# Altium PCB PCB1.PcbDoc
Units mil, origin at the board's own origin, x right, y up, seen from the top; angles counter-clockwise.
Board outline 9035 x 4000 mil, 4 copper layers (Top Layer, Mid-Layer 1, Mid-Layer 14, Bottom Layer); 25 components, 27 nets, 176 pads, 3 vias.
Unrouted connection lines stored in the file: 8.
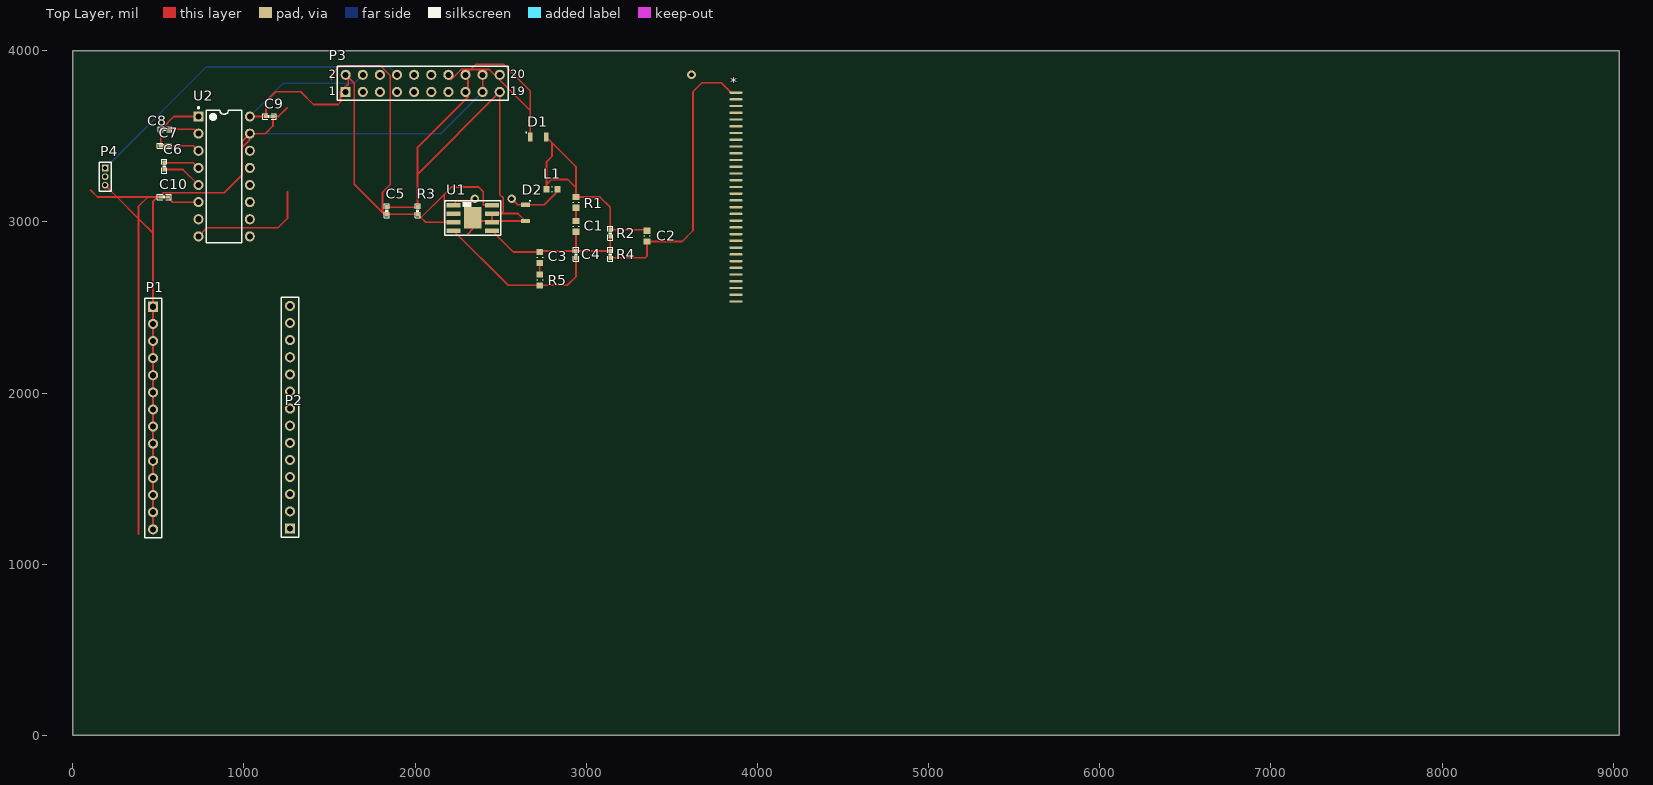
[diagram p0: Top Layer view]
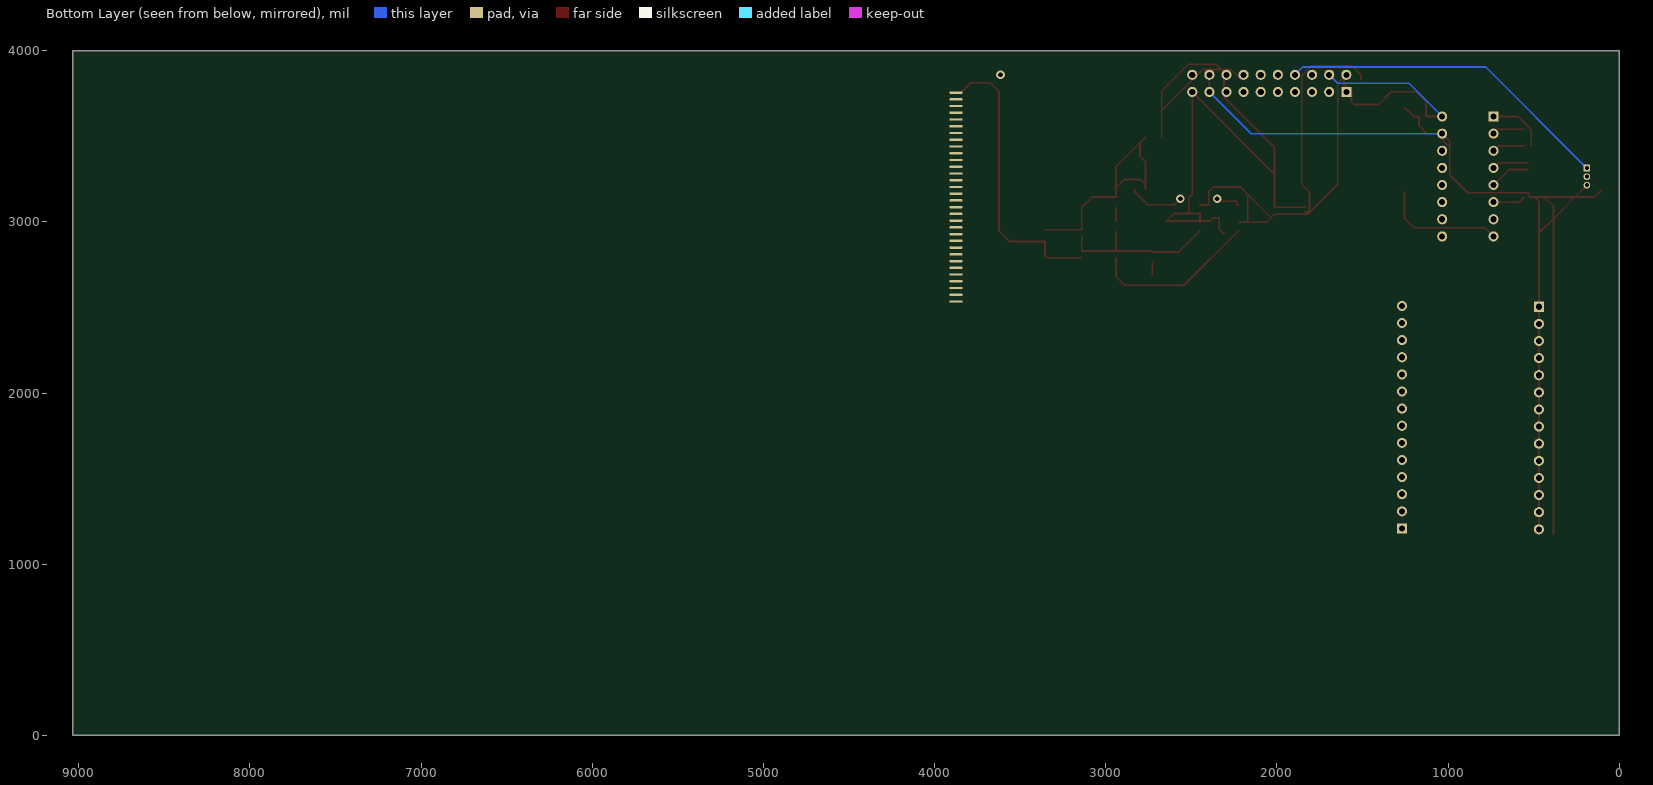
[diagram p1: Bottom Layer view, seen from below]
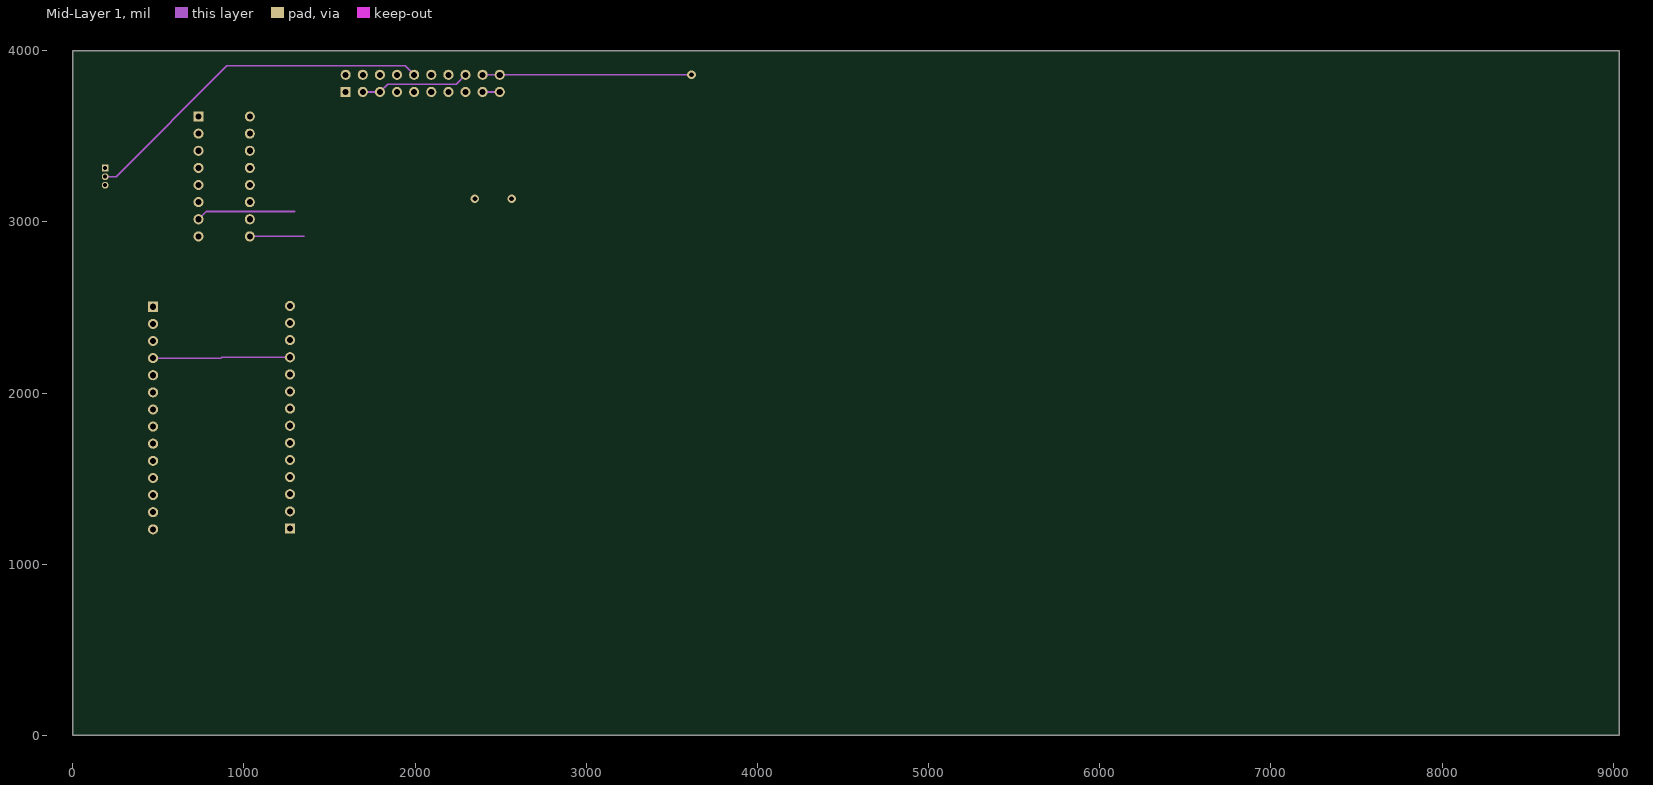
[diagram p2: Mid-Layer 1]
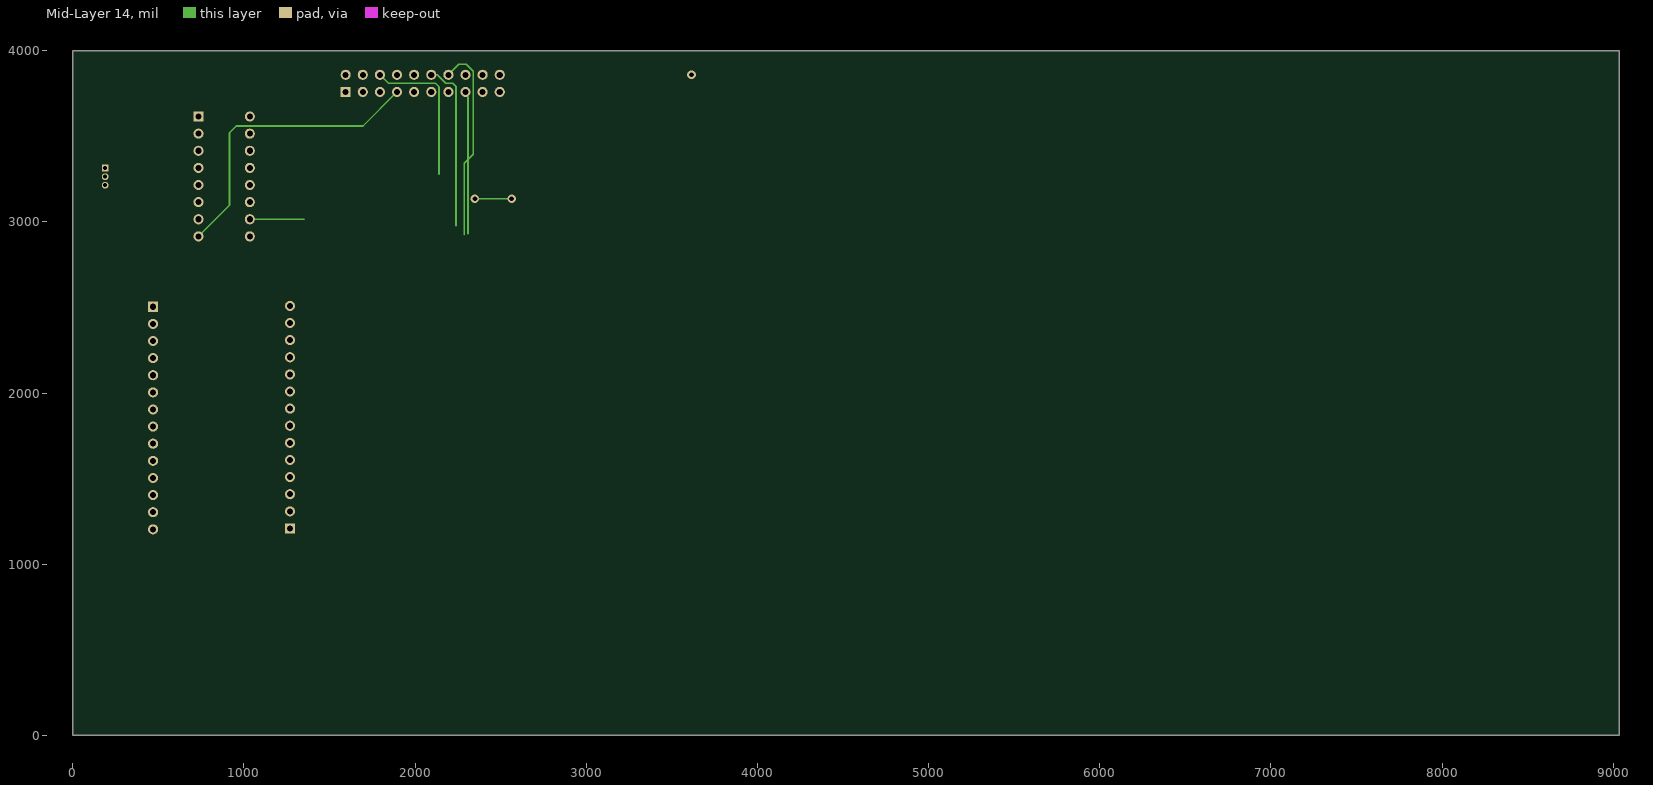
[diagram p3: Mid-Layer 14]

## Layer stack, top to bottom
Top Solder: solder mask 0.4, Solder Resist, Dk 3.5
Top Layer: signal copper 1.4
Dielectric 1: dielectric 12.6, FR-4, Dk 4.8
Mid-Layer 1: signal copper 1.4
Dielectric3: dielectric 12.6, FR-4, Dk 4.8
Mid-Layer 14: signal copper 1.4
Dielectric2: dielectric 12.6, FR-4, Dk 4.8
Bottom Layer: signal copper 1.4
Bottom Solder: solder mask 0.4, Solder Resist, Dk 3.5

## Board outline
0,0 9035,0 9035,4000 0,4000

## Design rules (kind name [scope] priority, off if disabled: settings)
Clearance [All] p1: gap=10
PolygonConnect [All] p1: connectstyle=Relief reliefconductorwidth=10 reliefentries=4 polygonreliefangle="90 Angle" airgapwidth=10
RoutingVias [All] p1: holewidth=28 width=50 viastyle="Through Hole" minholewidth=28 minwidth=50 maxholewidth=28 maxwidth=50
SolderMaskExpansion [All] p1: expansion=4
Width [All] p1: maxlimit=10 minlimit=10 preferedwidth=10
30 further rules are at their usual default settings.

## Classes and differential pairs
component class Serial: C6 C7 C8 C9 C10 U2
component class Master: * P1 P2 P3 P4
component class BoardPower: C1 C2 C3 C4 C5 D1 D2 L1 R1 R2 R3 R4 R5 U1

## Components (designator, comment, footprint, x,y, rotation, side; value= is the part's Value field where it differs from the comment)
* "PCIE-064-02-F-D-EMS2" PCIE-064-02-F-D-EMS2 3875,2534.49 r90 top
C1 "CAP_2" 0603 2940,2973.5 r270 top
C2 "CAP_1_25" 0603 3355,2916.5 r90 top
C3 "CAP_1_17" 0603 2729.25,2791.97 r90 top
C4 "CAP_1_16" 0402 2940,2810 r90 top
C5 "CAP_1_21_3" 0402 1835,3065 r270 top
C6 "CAP_1_21_4" 0402 535,3325 r270 top
C7 "CAP_1_21_4" 0402 535,3445 r0 top
C8 "CAP_1_21_4" 0402 540,3540 r0 top
C9 "CAP_1_21_4" 0402 1150,3615 r180 top
C10 "CAP_1_21_4" 0402 535,3145 r0 top
D1 "SCHOTTKY DIODE" SOD323 2720,3495 r0 top
D2 "SCHOTTKY DIODE" SOD323 2645,3051.89 r270 top
L1 "INDUCTOR" 0603 2800,3190 r180 top
P1 "Header 14" HDR1X14 470,2503.86 r270 top
P2 "Header 14" HDR1X14 1270,1208.86 r90 top
P3 "Header 10X2" HDR2X10 1595,3758.86 r0 top
P4 "MHDR1X3" MHDR1X3 190,3313.86 r270 top
R1 "RES_9" 0603 2940,3113.5 r90 top
R2 "RES_38" 0402 3140,2933.78 r90 top
R3 "RES_11" 0402 2015,3065 r90 top
R4 "RES_49" 0402 3140,2810 r90 top
R5 "RES_32" 0603 2729.25,2660.47 r90 top
U1 "L7986ATR" L7986ATR 2337.54,3022.97 r0 top
U2 "MAX232N" TI-N16 885,3265 r0 top

## Footprints (in the part's own frame and the unit in brackets; to place one, negate y for a bottom-side part, rotate by r counter-clockwise, add the part's x,y. Pads: shape width x height; smd on the part's side, far side on the other; paste and mask are expansions set on the pad)
0402 [mil] "0402"
  rect 25x20 smd mask+2: 1(-20,0) 2(20,0)
  silkscreen extent -40,-15 40,15, body extent -20,-10 20,10, height 16
0603 [mm] "Body 1.6x0.8mm, Height 0.55mm, IPC Medium Density"
  rect 0.9x1 smd: 1(-0.8,0) 2(0.8,0)
  silkscreen extent -0.05,-0.4 0.05,0.4, body extent -0.87,-0.48 0.88,0.47, height 0.55
HDR1X14 [mm] "Connector; Header; 14 Position"
  rect 1.5x1.5 hole 0.9: 1(0,0)
  round 1.5 hole 0.9: 2(2.54,0) 3(5.08,0) 4(7.62,0) 5(10.16,0) 6(12.7,0) 7(15.24,0) 8(17.78,0) 9(20.32,0) 10(22.86,0) 11(25.4,0) 12(27.94,0) 13(30.48,0) 14(33.02,0)
  silkscreen extent -1.27,-1.27 34.29,1.27
HDR2X10 [mm] "Connector; Header; 10x2 Position"
  rect 1.5x1.5 hole 0.9: 1(0,0)
  round 1.5 hole 0.9: 2(0,2.54) 3(2.54,0) 4(2.54,2.54) 5(5.08,0) 6(5.08,2.54) 7(7.62,0) 8(7.62,2.54) 9(10.16,0) 10(10.16,2.54) 11(12.7,0) 12(12.7,2.54) 13(15.24,0) 14(15.24,2.54) 15(17.78,0) 16(17.78,2.54) 17(20.32,0) 18(20.32,2.54) 19(22.86,0) 20(22.86,2.54)
  silkscreen extent -1.27,-1.27 24.13,3.81
L7986ATR [mil] "L7986ATR"
  rect 80x26 smd: 1(-112.5,75) 2(-112.5,25) 3(-112.5,-25) 4(-112.5,-75) 5(112.46,-74.97) 6(112.46,-24.97) 7(112.46,25.03) 8(112.46,75.03)
  rect 100x126 smd paste-1000: 9(0,0)
  silkscreen extent -163,-100 162,100, body extent -151,-98 151,98, height 85
MHDR1X3 [mm] "Connector; Header; 3 Position"
  rect 1x1 hole 0.6: 1(0,0)
  round 1 hole 0.6: 2(1.27,0) 3(2.54,0)
  silkscreen extent -0.9,-0.9 3.44,0.9
PCIE-064-02-F-D-EMS2 [mm]
  rect 0.35x2 smd: A1(0,0) A10(9,0) A20(19,0) A30(29,0)
  oval 0.35x2 smd: A2(1,0) A3(2,0) A4(3,0) A5(4,0) A6(5,0) A7(6,0) A8(7,0) A9(8,0) A11(10,0) A12(11,0) A13(12,0) A14(13,0) A15(14,0) A16(15,0) A17(16,0) A18(17,0) A19(18,0) A21(20,0) A22(21,0) A23(22,0) A24(23,0) A25(24,0) A26(25,0) A27(26,0) A28(27,0) A29(28,0) A31(30,0) A32(31,0)
  rect 0.35x2 smd far side: B1(0,0) B10(9,0) B20(19,0) B30(29,0)
  oval 0.35x2 smd far side: B2(1,0) B3(2,0) B4(3,0) B5(4,0) B6(5,0) B7(6,0) B8(7,0) B9(8,0) B11(10,0) B12(11,0) B13(12,0) B14(13,0) B15(14,0) B16(15,0) B17(16,0) B18(17,0) B19(18,0) B21(20,0) B22(21,0) B23(22,0) B24(23,0) B25(24,0) B26(25,0) B27(26,0) B28(27,0) B29(28,0) B31(30,0) B32(31,0)
SOD323 [mm]
  rect 0.65x1.35 smd: 1(1.2,0) 2(-1.2,0)
  silkscreen extent -1.9,0.5 -1.7,0.8
TI-N16 [mm] "DIP, 16-Leads, Row Spacing 7.62mm, Pitch 2.54mm, Body 19.3x6.4mm"
  rect 1.5x1.5 hole 0.9: 1(-3.81,8.89)
  round 1.5 hole 0.9: 2(-3.81,6.35) 3(-3.81,3.81) 4(-3.81,1.27) 5(-3.81,-1.27) 6(-3.81,-3.81) 7(-3.81,-6.35) 8(-3.81,-8.89) 9(3.81,-8.89) 10(3.81,-6.35) 11(3.81,-3.81) 12(3.81,-1.27) 13(3.81,1.27) 14(3.81,3.81) 15(3.81,6.35) 16(3.81,8.89)
  silkscreen extent -3.93,-9.85 2.65,10.31, body extent -3.3,-9.85 3.3,9.85, height 5.08

## Part data
C1: "4.7nF 10% 50V"
C2: "22uF 20% 6.3V"
C3: "15nF 10% 50V"
C4: "150pF 5% 50V"
C5: "1uF 10% 50V"
C6 C7 C8 C9 C10: "1uF 10% 10V"
P1 P2: "Header, 14-Pin"
P3: "Header, 10-Pin, Dual row"
P4: "Header, 3-Pin"
R1: "RES 100 0.1W ±1% 0603 (1608)"
R2: "RES 4.99K ±1% 0603 (1608)"
R3: "RES 100K 0.1W ±1% 0603 (1608 Metric)"
R4: "RES 680 ±1% 0603 (1608)"
R5: "RES 3.4K ±1% 0603 (1608)"
U1: "IC Switching Regulator 3A STEP-DOWN 8-HSOP"
U2: "Dual EIA-232 Driver / Receiver, 0 to 70 degC, 16-Pin PDIP (N), Pb-Free (RoHS)"

## Via types
v1: diameter 50, hole 28, Top Layer to Bottom Layer, 3 vias

## Nets (pads, with @x,y where several pads share a name; then routed paths per layer and width w, separated by ;. In a path a pad name is that pad's centre, name@x,y a point inside that pad or via, vN(x,y) a via of type N, cw(c..) or ccw(c..) an arc to the next point about the centre after c; other vN are vias at no path point)
GND: C2.1 C5.1 C9.1 C10.1 D2.1 P1.1 P1.2 P1.3 P1.4 P1.5 P1.6 P1.7 P1.8 P1.9 P1.10 P1.11 P1.12 P1.13 P1.14 P2.11 P3.17 P3.18 P3.19 P3.20 P4.3 R3.2 R4.1 U1.6 U1.7 U1.9 U2.15 | length 15273.8
  Top Layer w10: 105,3185 145,3145 258.86,3145 ; P4.3 258.86,3145 ; 385,1175 385,3018.86 ; P1.14 P1.13 P1.12 P1.11 P1.10 P1.9 P1.8 P1.7 P1.6 P1.5 P1.4 P1.3 P1.2 P1.1 470,2933.86 ; 1253,3666 1202,3615 C9.1 1170,3560 1125,3515 U2.15 ; C5.1 R3.2 2015,3278.86 ; 2310,2931.14 2337.54,2958.68 U1.9 2370.03,3022.97 2388.35,3004.65 U1.6@2450,3004.65 ; 2310,3830 2310,3730 2015,3435 2015,3278.86 ; P3.17 P3.18 ; R4.1 3345,2790 3355,2800 C2.1 3560,2885 3624,2949 3624,3760 3676,3812 3789.81,3812 3841.26,3760.55 ; 258.86,3145 440,3145 ; 258.86,3145 385,3018.86 ; 385,3018.86 385,3090 440,3145 ; 385,3018.86 470,2933.86 ; 440,3145 495,3145 ; 470,2933.86 470,3120 495,3145 ; 495,3145 C10.1 527,3145 527,3170 885,3170 990,3275 990,3435 ; 990,3435 1035,3480 U2.15 ; 990,3435 990,3470 U2.15 ; 2015,3278.86 P3.19 2495,3160 2515,3140 2515,3060 2503,3048 ; U1.6@2450,3004.65 U1.6 U1.6@2456.65,3004.65 ; U1.6@2450,3004.65 U1.7 2503,3048 ; U1.6@2450,3004.65 U1.6@2456.65,3004.65 ; U1.6@2456.65,3004.65 D2.1 2601.65,3048 2503,3048
  Mid-Layer 1 w10: P1.4 867,2203.86 872,2208.86 P2.11 ; P3.17 P3.19 ; P3.18 P3.20 v1(3615,3858.86)
  Mid-Layer 14 w10: 2310,2931.14 2310,3730
  Bottom Layer w10: U2.15 2151.14,3515 P3.17
NetC1_1: C1.1 R1.1 | length 77
  Top Layer w10: C1.1 R1.1
NetC1_2: C1.2 C3.2 C4.2 R2.1 R4.2 U1.5 | length 940.1
  Top Layer w10: U1.5 2574.54,2823.46 C3.2 2735.79,2830 C4.2 ; C1.2 C4.2 ; R2.1 R4.2 C4.2
NetC2_2: C2.2 D1.1 L1.2 R1.2 R2.2 | length 1482.5
  Top Layer w10: D1.1 2800,3462.24 ; L1.2 2768.5,3220 ; C2.2 3349.21,2953.78 R2.2 3140,3085 3080,3145 R1.2 2940,3200 ; 2768.5,3220 2795.5,3247 2893,3247 2940,3200 ; 2768.5,3220 2768.5,3350.75 2800,3382.24 2800,3462.24 ; 2800,3462.24 2940,3322.24 2940,3200
NetC3_1: C3.1 R5.2 | length 68.5
  Top Layer w10: R5.2 C3.1
NetC4_1: C4.1 R5.1 U1.4 | length 978.2
  Top Layer w10: U1.4 2544.03,2628.98 R5.1 2888.98,2628.98 2940,2680 C4.1
NetC5_2: C5.2 P3.2 R3.1 U1.3 U1.8 | length 3348.7
  Top Layer w10: 1510,3830 1510,3860 1560,3910 1800,3910 1855,3855 1855,3218 1810,3173 1810,3057 1835,3057 C5.2 ; P3.2 1644.86,3809 1644.86,3220.14 1820,3045 C5.2 ; U1.3 2180.03,2997.97 ; U1.8 2399,3098 2399,3176.08 2371.08,3204 2214,3204 2170,3160 ; C5.2 R3.1 2035,3025 ; 2035,3025 2062.03,2997.97 2180.03,2997.97 ; 2035,3025 2170,3160 ; 2170,3160 2170,3008 2180.03,2997.97
NetC6_1: C6.1 U2.4 | length 212.4
  Top Layer w10: C6.1 705,3345 U2.4
NetC6_2: C6.2 U2.5 | length 237.3
  Top Layer w10: C6.2 645,3305 U2.5
NetC7_1: C7.1 C8.1 U2.1 | length 345.3
  Top Layer w10: C7.1 515,3535 C8.1 520,3543.71 591.29,3615 U2.1
NetC7_2: C7.2 U2.3 | length 192.4
  Top Layer w10: C7.2 705,3445 U2.3
NetC8_2: C8.2 U2.2 | length 185.4
  Top Layer w10: C8.2 710,3540 U2.2
NetC9_2: C9.2 P3.4 U2.16 | length 1595
  Top Layer w10: U2.16 C9.2 1130,3704 1186,3760 1332,3760 1407,3685 1550,3685 1565,3700 1565,3763 1600,3798 1610,3798 1610,3830
  Bottom Layer w10: U2.16 1229,3809 1645.14,3809 P3.4
NetC10_2: C10.2 U2.6 | length 192.4
  Top Layer w10: C10.2 585,3115 U2.6
NetD1_2: D1.2 P3.3 P3.5 P3.16 | length 1965.3
  Top Layer w10: 2210,3830 2270,3890 2326.14,3890 ; P3.16 2326.14,3890 ; D1.2 2672.76,3650 ; 2326.14,3890 2356.14,3920 2517,3920 2672.76,3764.24 2672.76,3650 ; 2326.14,3890 2432.76,3890 2672.76,3650
  Mid-Layer 1 w10: P3.3 P3.5 1840.14,3804 2240.14,3804 P3.16
NetD2_2: D2.2 L1.1 U1.1 | length 695.1
  Top Layer w10: U1.1 2235,3097.97 2235,3120 2335,3120 v1(2350,3135) ; v1(2564.13,3135) 2600,3099.13 D2.2 2754.13,3099.13 2831.5,3176.5 L1.1
  Mid-Layer 14 w10: v1(2350,3135) v1(2564.13,3135)
NetP2_8: P2.8 P3.14 | length 1163
  Mid-Layer 14 w10: P3.14 2256.14,3920 2300,3920 2340,3880 2340,3395 2287,3342 2287,2925.86
NetP2_9: P2.9 P3.12 | length 984.1
  Mid-Layer 14 w10: P3.12 2130,3858.86 2179.86,3809 2220,3809 2240,3789 2240,2978.86
NetP2_13: P2.13 P3.6 | length 884.1
  Mid-Layer 14 w10: P3.6 1844.86,3809 2120,3809 2140,3789 2140,3278.86
NetP3_1: P3.1
NetP3_7: P3.7 U2.8 | length 2476.4
  Top Layer w10: U2.8 785,2965 1200,2965 1255,3020 1255,3175
  Mid-Layer 14 w10: U2.8 916,3096 916,3520 956,3560 1696.14,3560 P3.7
NetP3_8: P3.8 P4.1 | length 1968.1
  Bottom Layer w10: P4.1 780.14,3904 1849.86,3904 P3.8
NetP3_9: P3.9 U2.7 | length 579.8
  Mid-Layer 1 w10: U2.7 780,3060 1296.14,3060
NetP3_10: P3.10 P4.2 | length 2094.7
  Mid-Layer 1 w10: P4.2 253.86,3263.86 901,3911 1942.86,3911 P3.10
NetP3_11: P3.11 U2.10 | length 316.1
  Mid-Layer 14 w10: U2.10 1351.14,3015
NetP3_13: P3.13 U2.9 | length 316.1
  Mid-Layer 1 w10: U2.9 1351.14,2915
NetP3_15: P3.15
pads on no net: *.A1 *.A2 *.A3 *.A4 *.A5 *.A6 *.A7 *.A8 *.A9 *.A10 *.A11 *.A12 *.A13 *.A14 *.A15 *.A16 *.A17 *.A18 *.A19 *.A20 *.A21 *.A22 *.A23 *.A24 *.A25 *.A26 *.A27 *.A28 *.A29 *.A30 *.A31 *.A32 *.B1 *.B2 *.B3 *.B4 *.B5 *.B6 *.B7 *.B8 *.B9 *.B10 *.B11 *.B12 *.B13 *.B14 *.B15 *.B16 *.B17 *.B18 *.B19 *.B20 *.B21 *.B22 *.B23 *.B24 *.B25 *.B26 *.B27 *.B28 *.B29 *.B30 *.B31 *.B32 P2.1 P2.2 P2.3 P2.4 P2.5 P2.6 P2.7 P2.10 P2.12 P2.14 U1.2 U2.11 U2.12 U2.13 U2.14

## Silkscreen, mask and mechanical layers (free items; w line width, h text height)
Mechanical 4:
  circle w0.25: c10,29.99 r0.12
  circle w0.25: c10,29.99 r0.12
  circle w0.25: c10,29.99 r0.12
  circle w0.25: c10,29.99 r0.12

## Text inside footprints (layer, text, board x,y; h text height)
P3: Top Overlay "20" at 2555,3838.86 h50; Top Overlay "19" at 2555,3738.86 h50; Top Overlay "1" at 1495,3738.86 h50; Top Overlay "2" at 1495,3838.86 h50